# Altium PCB MCU_PCB.PcbDoc (part 1 of 2)
Units mm, origin at the board's own origin, x right, y up, seen from the top; angles counter-clockwise.
Board outline 44.96 x 8.25 mm, 4 copper layers (Top Layer, Layer 1, Layer 2, Bottom Layer), stack 0.797 mm thick; 87 components, 49 nets, 262 pads, 147 vias.
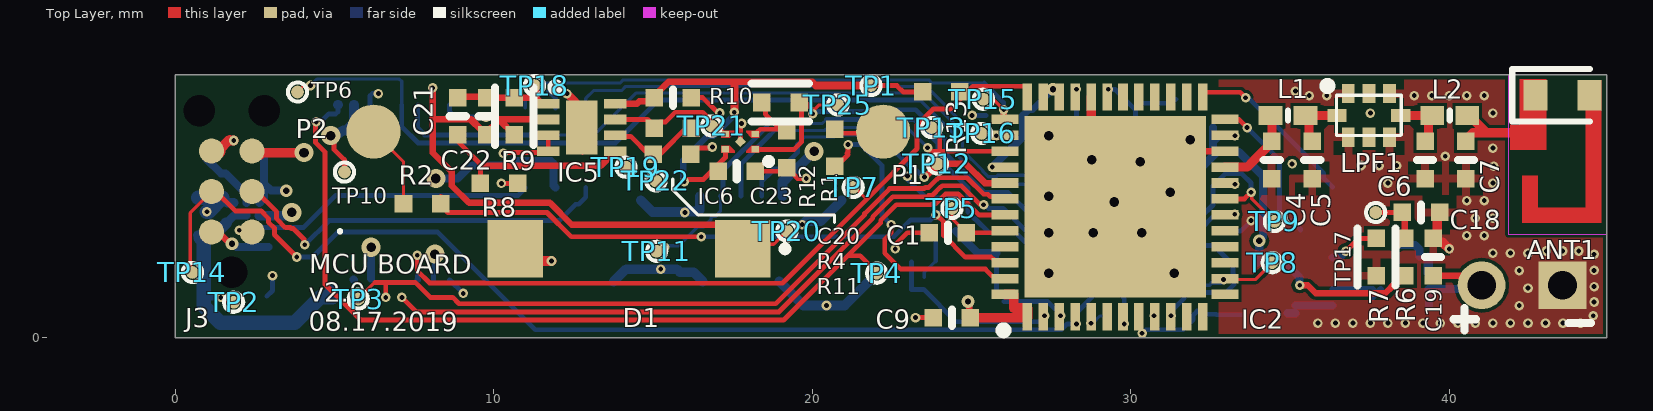
[diagram p0: Top Layer view]
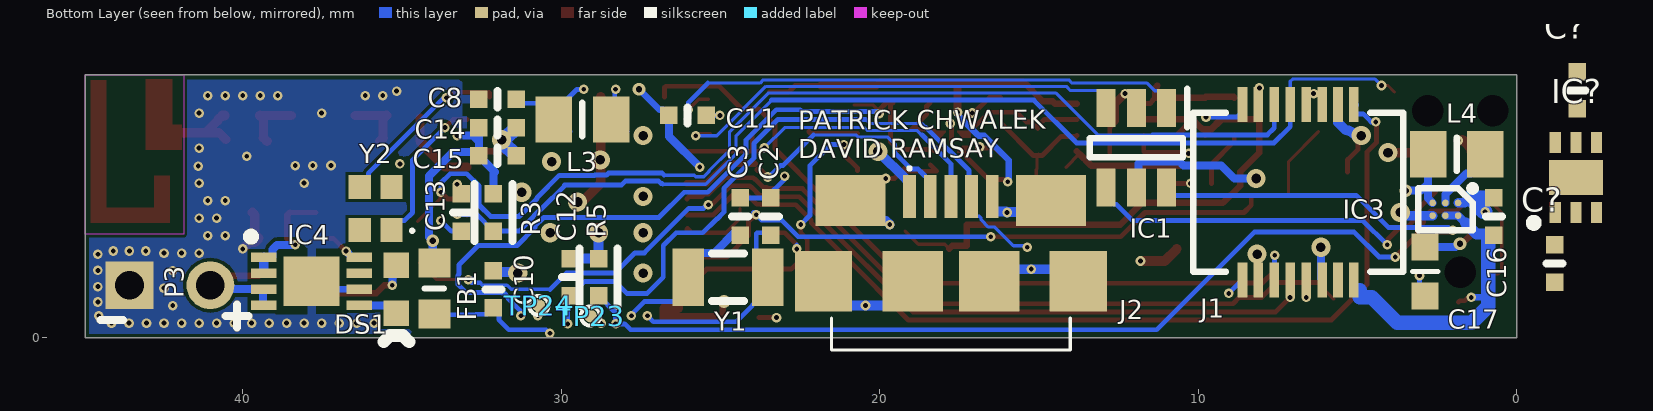
[diagram p1: Bottom Layer view, seen from below]
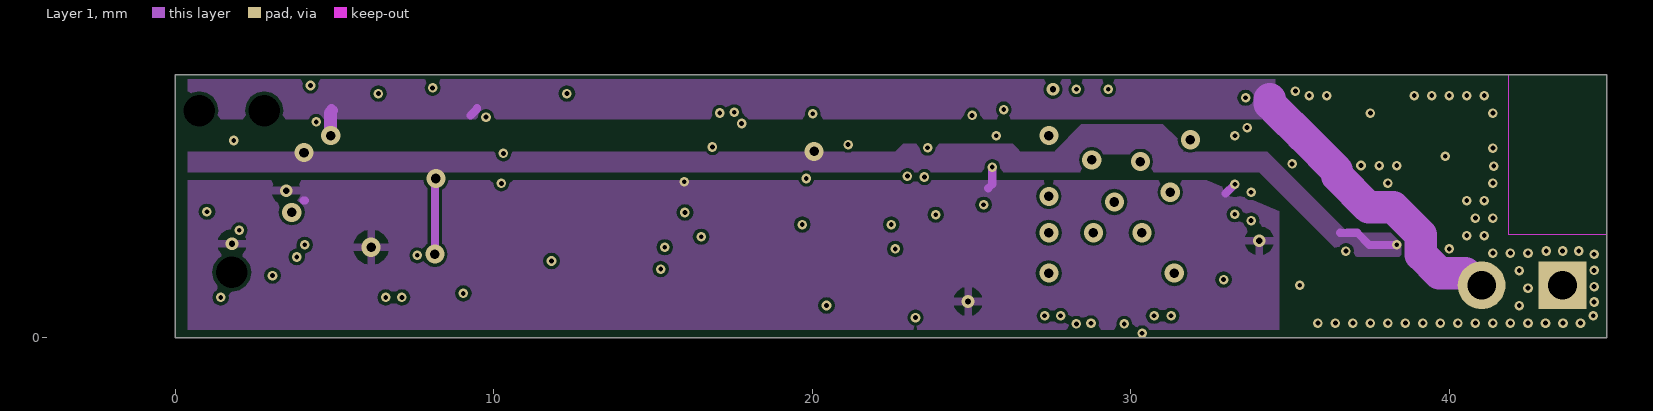
[diagram p2: Layer 1]
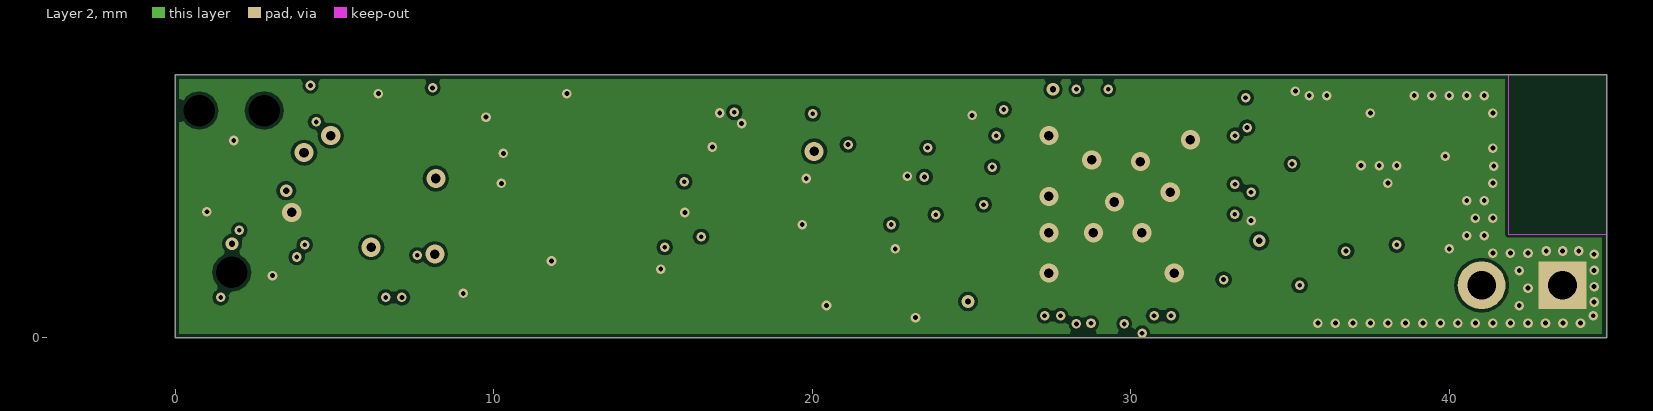
[diagram p3: Layer 2]
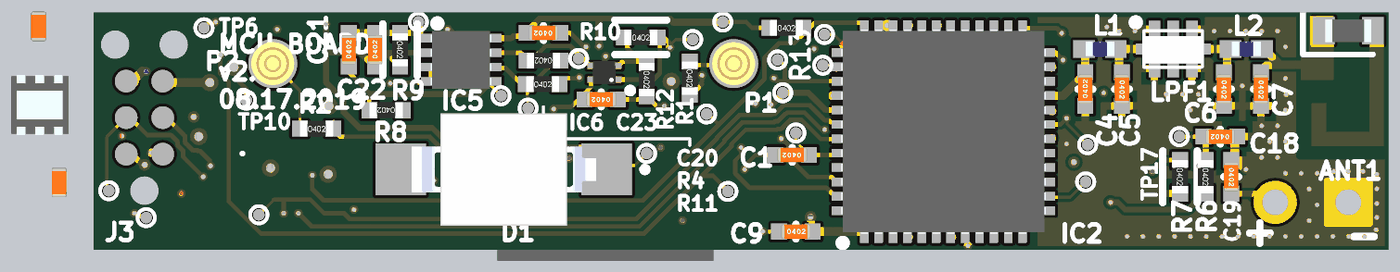
[diagram p4: 3D render of the assembled board from above, using the file's embedded part models]
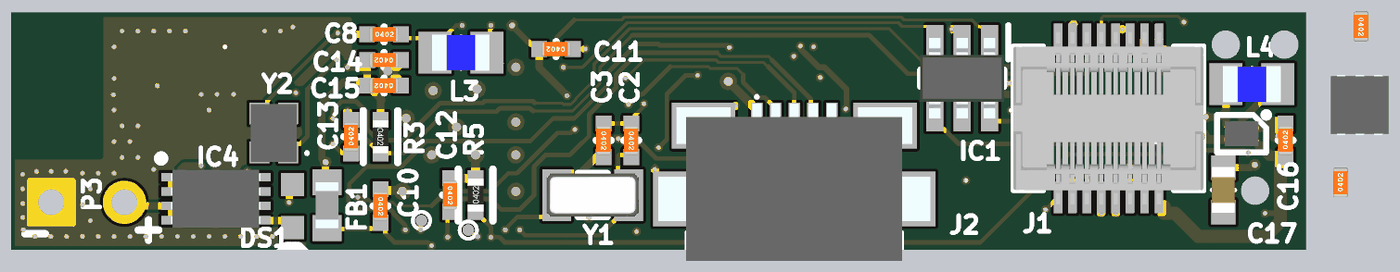
[diagram p5: 3D render of the assembled board from below, using the file's embedded part models]

## Layer stack, top to bottom
Top Solder: solder mask 0.0102, Solder Resist, Dk 3.5
Top Layer: signal copper 0.0356
Dielectric 2: prepreg 0.168, PP-006, Dk 4.1
Layer 1: signal copper 0.035
Dielectric 1: dielectric 0.32, FR-4, Dk 4.8
Layer 2: signal copper 0.035
Dielectric 3: prepreg 0.168, PP-006, Dk 4.1
Bottom Layer: signal copper 0.0356
Bottom Solder: solder mask 0.0102, Solder Resist, Dk 3.5

## Board outline
0,0 44.958,0 44.958,8.255 0,8.255

## Design rules (kind name [scope] priority, off if disabled: settings)
AssemblyTestpoint [(IsPad And (OnTopLayer Or OnBottomLayer)) Or (IsVia) Or (IsPad And OnMultiLayer)] p1: testpointundercomponent=TRUE minsize=0.5 maxsize=2.54 preferedsize=1 minholesize=0 maxholesize=1.016 preferedholesize=0.813 testpointgrid=0.025 usegrid=FALSE gridtolerance=0 allowsidetop=TRUE
Clearance [All] p1: gap=0.102 ignorepadtopadclearanceinfootprint=FALSE except(0: Arc-Hole Track-Hole SMDPad-Hole THPad-Hole Via-Hole Fill-Hole Poly-Hole Region-Hole Text-Hole)
PolygonConnect NO_THERMAL [InNet('GND')    or InNet('5V')] p1: thpad.connectstyle=Direct thpad.reliefconductorwidth=0.254 thpad.reliefentries=4 thpad.polygonreliefangle="90 Angle" thpad.airgapwidth=0.254 smdpad.connectstyle=Relief smdpad.reliefconductorwidth=0.254 smdpad.reliefentries=4 smdpad.polygonreliefangle="90 Angle" smdpad.airgapwidth=0.254 via.connectstyle=Direct via.reliefconductorwidth=0.254 via.reliefentries=4 via.polygonreliefangle="90 Angle" via.airgapwidth=0.254
PolygonConnect [All] p2: connectstyle=Relief reliefconductorwidth=0.254 reliefentries=4 polygonreliefangle="90 Angle" airgapwidth=0.254
RoutingVias PWR_Vias [InNet('3.3V') or InNet('5V') or InNet('VBAT') or InNet('VBAT_RAW') or InNet('3.3V_MCU')       or InNet('VBAT_1')] p1: holewidth=0.3 width=0.6 viastyle="Through Hole" minholewidth=0.15 minwidth=0.3 maxholewidth=0.711 maxwidth=1.27
RoutingVias [All] p2: holewidth=0.15 width=0.3 viastyle="Through Hole" minholewidth=0.15 minwidth=0.3 maxholewidth=0.354 maxwidth=0.762
SolderMaskExpansion [All] p1: expansion=0.102
Width RF [InNet('RF_OUT') or InNet('NetC5_2') or InNet('NetC6_2') or InNet('NetANT1_1')] p1: maxlimit=0.457 minlimit=0.152 preferedwidth=0.305 midlayer1_minwidth=0.254 midlayer1_maxwidth=0.254 midlayer1_prefwidth=0.254 midlayer2_minwidth=0.254 midlayer2_maxwidth=0.254 midlayer2_prefwidth=0.254 minimp=50.000000 maximp=50.000000 favimp=50.000000
Width PWR [InNet('3.3V') or InNet('5V') or InNet('VBAT') or InNet('VBAT_1') or InNet('GND')   or InNet('VBAT_MUX')] p2: maxlimit=1.016 minlimit=0.152 preferedwidth=0.457 toplayer_maxwidth=0.457 toplayer_prefwidth=0.305 midlayer1_minwidth=0.254 midlayer2_minwidth=0.254 midlayer2_maxwidth=0.254 midlayer2_prefwidth=0.254 bottomlayer_maxwidth=0.457 bottomlayer_prefwidth=0.305 minimp=50.000000 maximp=50.000000 favimp=50.000000
Width [All] p3: maxlimit=0.254 minlimit=0.102 preferedwidth=0.254 toplayer_maxwidth=0.203 toplayer_prefwidth=0.152 midlayer1_minwidth=0.254 midlayer2_minwidth=0.254 bottomlayer_prefwidth=0.152 minimp=50.000000 maximp=50.000000 favimp=50.000000
29 further rules are at their usual default settings.

## Classes and differential pairs
component class Sch_sensors: C20 C21 C22 C23 D1 IC5 IC6 R4 R8 R9 R10 R11 R12 TP18 TP19 TP20 TP21 TP22 TP25
component class Sch_pwr: C16 C17 C18 C19 C? DS1 IC3 IC4 IC? L4 P3 R6 R7
component class Sch_mcu: ANT1 C2 C3 C4 C5 C6 C7 C8 C9 C10 C11 C12 C13 C14 C15 FB1 IC2 L1 L2 L3 LPF1 R3 R5 R13 TP23 TP24 Y1 Y2
component class Sch_external_connectors: C1 IC1 J1 J2 J3 P1 P2 R1 R2 TP1 TP2 TP3 TP4 TP5 TP6 TP7 TP8 TP9 TP10 TP11 TP12 TP13 TP14 TP15 TP16 TP17

## Components (designator, comment, footprint, x,y, rotation, side; value= is the part's Value field where it differs from the comment)
ANT1 "2450AT14A0100T" ANTC1608X40N 43.561,7.62 r0 top
C1 "10000pF" SMD-0402C 24.257,3.302 r90 top
C2 "15pF" SMD-0402C 23.425,3.81 r0 bottom
C3 "15pF" SMD-0402C 24.384,3.81 r0 bottom
C4 "0.80pF" SMD-0402C 34.433,5.588 r0 top
C5 "0.30pF" SMD-0402C 35.703,5.588 r180 top
C6 "0.80pF" SMD-0402C 39.243,5.588 r180 top
C7 "0.30pF" SMD-0402C 40.529,5.588 r180 top
C8 "4.7µF" SMD-0402C 32.004,7.493 r270 bottom
C9 "0.10µF" SMD-0402C 24.384,0.635 r270 top
C10 "0.10µF" SMD-0402C 32.131,1.524 r0 bottom
C11 "0.10µF" SMD-0402C 26.035,6.985 r90 bottom
C12 "0.10µF" SMD-0402C 29.718,1.905 r0 bottom
C13 "0.10µF" SMD-0402C 33.147,3.937 r180 bottom
C14 "0.10µF" SMD-0402C 32.004,6.604 r90 bottom
C15 "100pF" SMD-0402C 32.004,5.715 r90 bottom
C16 "2.2µF" SMD-0402C 0.711,3.81 r180 bottom
C17 "10µF" SMD-0603C 2.87,2.083 r0 bottom
C18 "4.7µF" SMD-0402C 39.116,3.937 r90 top
C19 "4.7µF" SMD-0402C 39.497,2.54 r180 top
C20 "0.10µF" SMD-0402C 15.621,7.544 r90 top
C21 "10000pF" SMD-0402C 8.865,6.96 r0 top
C22 "5pF" SMD-0402C 9.779,6.96 r0 top
C23 "0.10µF" SMD-0402C 17.628,5.232 r90 top
C? "1µF" SMD-0402C -1.194,2.337 r180 bottom
C? "1µF" SMD-0402C -1.905,7.772 r0 bottom
D1 "VBPW34FASR" VBPW34FASR 14.243,2.794 r180 top
DS1 "LTST-C190KFKT" LTST-C190KFKT_V 35.179,1.524 r270 bottom
FB1 "BLM18KG601SZ1D" BEADC1608X95N 33.985,1.549 r90 bottom
IC1 "USBLC6-2SC6" SOT95P280X145-6N 11.938,5.969 r270 bottom
IC2 "STM32WB55CGU6" QFN50P700X700X65-49N-D 29.508,4.112 r90 top
IC3 "FAN53600AUC33X" BGA6C40P2X3_86X116X62 2.235,4.039 r270 bottom
IC4 "MCP73831T-2ACI_MC" SON50P300X200X100-9N-D 37.846,1.778 r180 bottom
IC5 "TLV9062IDSGT" SON50P200X200X80-9N 12.759,6.608 r0 top
IC6 "TLV9061DPWR" X2SON 17.742,6.161 r180 top
IC? "MCP1700T-3302E_MAY" SON65P200X200X90-7N -1.865,5.037 r90 bottom
J1 "54722-0164" 54722-0164 6.858,4.572 r180 bottom
J2 "ZX62-B-5PA(33)" ZX62B5PA33 17.765,2.495 r180 bottom
J3 "TC2030-CTX-NL" TC2030MCPNL10 1.97,4.597 r90 top
L1 "LQG15HS2N7S02D" INDC1005X55N 34.941,6.985 r0 top
L2 "LQG15HS2N7S02D" INDC1005X55N 40.021,6.985 r0 top
L3 "LBR2012T100K" INDC2012X145N 29.337,6.858 r0 bottom
L4 "LQM21PN1R0MC0D" INDC2012X55N 1.88,5.766 r0 bottom
LPF1 "LFL212G45TC1A007" LFL212G45TC1A007 37.481,6.985 r0 top
P1 "P70-5000045R" P70-5000045R 22.225,6.477 r0 top
P2 "P70-5000045R" P70-5000045R 6.223,6.477 r0 top
P3 "Header 2" HDR1X2 43.561,1.651 r180 bottom
R1 "1k" SMD-0402-RES 20.701,5.969 r180 top
R2 "1k" SMD-0402-RES 7.747,4.216 r270 top
R3 "10k" SMD-0402-RES 32.131,3.937 r0 bottom
R4 "20k" SMD-0402-RES 15.621,6.579 r90 top
R5 "100k" SMD-0402-RES 28.829,1.905 r180 bottom
R6 "80.6k" SMD-0402-RES 38.608,2.54 r180 top
R7 "10k" SMD-0402-RES 37.719,2.54 r180 top
R8 "47k" SMD-0402-RES 10.16,4.851 r90 top
R9 "100k" SMD-0402-RES 10.643,6.96 r180 top
R10 "20k" SMD-0402-RES 18.999,7.391 r270 top
R11 "3.3k" SMD-0402-RES 15.596,5.766 r270 top
R12 "3.3k" SMD-0402-RES 19.205,5.921 r180 top
R13 "10k" SMD-0402-RES 24.054,7.722 r270 top
TP1 "TestPoint" TESTPOINT_0.4MM 21.846,7.923 r90 top
TP2 "TestPoint" TESTPOINT_0.4MM 1.829,1.118 r90 top
TP3 "TestPoint" TESTPOINT_0.4MM 5.74,1.219 r90 top
TP4 "TestPoint" TESTPOINT_0.4MM 22.022,2.032 r90 top
TP5 "TestPoint" TESTPOINT_0.4MM 24.384,4.064 r90 top
TP6 "TestPoint" TESTPOINT_0.4MM 3.835,7.722 r90 top
TP7 "TestPoint" TESTPOINT_0.4MM 21.285,4.724 r90 top
TP8 "TestPoint" TESTPOINT_0.4MM 34.442,2.362 r90 top
TP9 "TestPoint" TESTPOINT_0.4MM 34.512,3.658 r90 top
TP10 "TestPoint" TESTPOINT_0.4MM 5.309,5.207 r90 top
TP11 "TestPoint" TESTPOINT_0.4MM 15.113,2.718 r90 top
TP12 "TestPoint" TESTPOINT_0.4MM 23.927,5.462 r90 top
TP13 "TestPoint" TESTPOINT_0.4MM 23.749,6.604 r90 top
TP14 "TestPoint" TESTPOINT_0.4MM 0.531,2.055 r90 top
TP15 "TestPoint" TESTPOINT_0.4MM 25.375,7.493 r180 top
TP16 "TestPoint" TESTPOINT_0.4MM 25.317,6.42 r90 top
TP17 "TestPoint" TESTPOINT_0.4MM 37.694,3.937 r90 top
TP18 "TestPoint" TESTPOINT_0.4MM 11.278,7.925 r90 top
TP19 "TestPoint" TESTPOINT_0.4MM 14.148,5.359 r90 top
TP20 "TestPoint" TESTPOINT_0.4MM 19.202,3.353 r90 top
TP21 "TestPoint" TESTPOINT_0.4MM 16.84,6.655 r90 top
TP22 "TestPoint" TESTPOINT_0.4MM 15.088,4.928 r90 top
TP23 "TestPoint" TESTPOINT_0.4MM 29.083,0.686 r90 bottom
TP24 "TestPoint" TESTPOINT_0.4MM 30.709,1.016 r90 bottom
TP25 "TestPoint" TESTPOINT_0.4MM 20.803,7.315 r90 top
Y1 "NX3215SA-32.768K-STD-MUA-8" NX3215SA 24.765,1.905 r0 bottom
Y2 "XRCGB32M000F1H01R0" XRCGB32M000F1H01R0 35.833,4.064 r90 bottom

## Footprints (in the part's own frame and the unit in brackets; to place one, negate y for a bottom-side part, rotate by r counter-clockwise, add the part's x,y. Pads: shape width x height; smd on the part's side, far side on the other; paste and mask are expansions set on the pad)
54722-0164 [mm]
  rect 0.3x1.1 smd: 1(-1.75,-2.75) 2(-1.75,2.75) 3(-1.25,-2.75) 4(-1.25,2.75) 5(-0.75,-2.75) 6(-0.75,2.75) 7(-0.25,-2.75) 8(-0.25,2.75) 9(0.25,-2.75) 10(0.25,2.75) 11(0.75,-2.75) 12(0.75,2.75) 13(1.25,-2.75) 14(1.25,2.75) 15(1.75,-2.75) 16(1.75,2.75)
  silkscreen extent -3.3,-2.5 3.3,2.5, body extent -3.3,-3 3.3,3, height 1.18
ANTC1608X40N [mm]
  rect 0.75x0.95 smd: 1(-0.85,0) 2(0.85,0)
  silkscreen extent -1.58,-0.82 0.85,0.82, body extent -0.8,-0.4 0.8,0.4, height 0.4
BEADC1608X95N [mm]
  rect 0.9x1 smd: 1(-0.8,0) 2(0.8,0)
  silkscreen extent 0,-0.3 0,0.3, body extent -0.8,-0.4 0.8,0.4, height 0.95
BGA6C40P2X3_86X116X62 [mm]
  round 0.208 smd: A1(-0.2,0.4) A2(0.2,0.4) B1(-0.2,0) B2(0.2,0) C1(-0.2,-0.4) C2(0.2,-0.4)
  silkscreen extent -0.75,-0.85 0.65,0.95, body extent -0.43,-0.58 0.43,0.58, height 0.63
HDR1X2 [mm] "Connector; Header; 2 Position"
  rect 1.5x1.5 hole 0.9: 1(0,0)
  round 1.5 hole 0.9: 2(2.54,0)
INDC1005X55N [mm]
  rect 0.75x0.6 smd: 1(-0.55,0) 2(0.55,0)
  silkscreen extent 0,-0.15 0,0.15, body extent -0.5,-0.25 0.5,0.25, height 0.55
INDC2012X55N [mm]
  rect 1.15x1.45 smd: 1(-0.9,0) 2(0.9,0)
  silkscreen extent 0,-0.53 0,0.53, body extent -1,-0.63 1,0.63, height 0.55
INDC2012X145N [mm]
  rect 1.15x1.45 smd: 1(-0.9,0) 2(0.9,0)
  silkscreen extent 0,-0.53 0,0.53, body extent -1,-0.63 1,0.63, height 1.45
LFL212G45TC1A007 [mm]
  rect 0.4x0.6 smd: 1(-0.65,0.685) 2(0,0.685) 3(0.65,0.685) 5(0.65,-0.685) 6(0,-0.685) 7(-0.65,-0.685)
  rect 0.6x0.4 smd: 4(1,0) 8(-1,0)
  silkscreen extent -1.42,-0.64 1.02,1.05, body extent -1,-0.5 1,0.45, height 0.87
LTST-C190KFKT_V [mm] "SMD, 2-Leads, Body 1.6x0.8mm"
  rect 0.8x0.8 smd: 1(-0.75,0) 2(0.75,0)
  silkscreen extent 1.45,-0.4 1.65,0.4, body extent -0.8,-0.4 0.8,0.4, height 0.9
NX3215SA [mm]
  rect 1x1.8 smd: 1(-1.25,0) 2(1.25,0)
  silkscreen extent -0.5,-0.75 0.5,0.75, body extent -1.6,-0.75 1.6,0.75, height 0.8
P70-5000045R [mm]
  round 1.7 smd: 1(0,0)
  body extent -0.75,-0.75 0.75,0.75, height 2.4
QFN50P700X700X65-49N-D [mm]
  rect 0.85x0.3 smd: 1(-3.45,2.75) 2(-3.45,2.25) 3(-3.45,1.75) 4(-3.45,1.25) 5(-3.45,0.75) 6(-3.45,0.25) 7(-3.45,-0.25) 8(-3.45,-0.75) 9(-3.45,-1.25) 10(-3.45,-1.75) 11(-3.45,-2.25) 12(-3.45,-2.75) 25(3.45,-2.75) 26(3.45,-2.25) 27(3.45,-1.75) 28(3.45,-1.25) 29(3.45,-0.75) 30(3.45,-0.25) 31(3.45,0.25) 32(3.45,0.75) 33(3.45,1.25) 34(3.45,1.75) 35(3.45,2.25) 36(3.45,2.75)
  rect 0.3x0.85 smd: 13(-2.75,-3.45) 14(-2.25,-3.45) 15(-1.75,-3.45) 16(-1.25,-3.45) 17(-0.75,-3.45) 18(-0.25,-3.45) 19(0.25,-3.45) 20(0.75,-3.45) 21(1.25,-3.45) 22(1.75,-3.45) 23(2.25,-3.45) 24(2.75,-3.45) 37(2.75,3.45) 38(2.25,3.45) 39(1.75,3.45) 40(1.25,3.45) 41(0.75,3.45) 42(0.25,3.45) 43(-0.25,3.45) 44(-0.75,3.45) 45(-1.25,3.45) 46(-1.75,3.45) 47(-2.25,3.45) 48(-2.75,3.45)
  rect 5.7x5.7 smd: 49(0,0)
  silkscreen extent -4,3.37 -3.75,3.62, body extent -3.55,-3.55 3.55,3.55, height 0.65
SMD-0402-RES [mm]
  rect 0.55x0.55 smd: 1(0,0.584) 2(0,-0.584)
  body extent -0.27,-0.57 0.28,0.58, height 0.41
SMD-0402C [mm]
  rect 0.55x0.55 smd: 1(0,0.584) 2(0,-0.584)
  silkscreen extent -0.25,0 0.25,0, body extent -0.25,-0.51 0.25,0.51, height 0.51
SMD-0603C [mm]
  rect 0.85x0.85 smd: 1(0,0.775) 2(0,-0.775)
  silkscreen extent -0.4,0 0.4,0, body extent -0.4,-0.8 0.4,0.8, height 0.9
SON50P200X200X80-9N [mm]
  rect 0.7x0.3 smd: 1(-1.05,0.75) 2(-1.05,0.25) 3(-1.05,-0.25) 4(-1.05,-0.75) 5(1.05,-0.75) 6(1.05,-0.25) 7(1.05,0.25) 8(1.05,0.75)
  rect 1x1.7 smd: 9(0,0)
  silkscreen extent -0.95,1.14 -0.7,1.39, body extent -1.05,-1 1.05,1, height 0.8
SON50P300X200X100-9N-D [mm]
  rect 0.8x0.3 smd: 1(-1.5,0.75) 2(-1.5,0.25) 3(-1.5,-0.25) 4(-1.5,-0.75) 5(1.5,-0.75) 6(1.5,-0.25) 7(1.5,0.25) 8(1.5,0.75)
  rect 1.75x1.55 smd: 9(0,0)
  silkscreen extent -2.02,1.28 -1.78,1.52, body extent -1.55,-1 1.55,1, height 1
SON65P200X200X90-7N [mm]
  rect 0.65x0.35 smd: 1(-1.1,0.65) 2(-1.1,0) 3(-1.1,-0.65) 4(1.1,-0.65) 5(1.1,0) 6(1.1,0.65)
  rect 1.1x1.7 smd: 7(0,0)
  silkscreen extent -1.55,1.2 -1.3,1.45, body extent -1.05,-1 1.05,1, height 0.9
SOT95P280X145-6N [mm]
  rect 1.2x0.6 smd: 1(-1.25,0.95) 2(-1.25,0) 3(-1.25,-0.95) 4(1.25,-0.95) 5(1.25,0) 6(1.25,0.95)
  silkscreen extent -1.85,-1.46 0.3,1.6, body extent -1.4,-1.46 1.4,1.46, height 1.45
TC2030MCPNL10 [mm]
  round 0.787 smd: 1(-1.27,-0.434) 2(-1.27,0.836) 3(0,-0.434) 4(0,0.836) 5(1.27,-0.434) 6(1.27,0.836)
  round 0.495 hole 0.991 unplated: 7(-2.54,0.201) 8(2.54,1.217) 9(2.54,-0.815)
  silkscreen extent -1.3,-3.25 -1.2,-3.15
TESTPOINT_0.4MM [mm]
  round 0.4 smd: 1(0,0)
  silkscreen extent -0.3,-0.3 0.3,0.3
VBPW34FASR [mm]
  rect 1.75x1.8 smd: 1(-3.575,0) 2(3.575,0)
  silkscreen extent -5,-0.1 -4.8,0.1, body extent -3.2,-1.95 3.2,1.95, height 1.51
X2SON [mm]
  rect 0.24x0.2 smd mask+0: 1(-0.47,0.24) 2(-0.47,-0.24) 4(0.47,-0.24) 5(0.47,0.24)
  rect 0.25x0.25 smd rot 45: 3(0,0)
  Top Layer region: -0.6,0.13 -0.6,0.35 -0.18,0.35 -0.18,0.29 -0.34,0.13
  Top Layer region: 0.6,-0.13 0.6,-0.35 0.18,-0.35 0.18,-0.29 0.34,-0.13
  Top Layer region: 0.6,0.13 0.6,0.35 0.18,0.35 0.18,0.29 0.34,0.13
  Top Layer region: -0.6,-0.13 -0.6,-0.35 -0.18,-0.35 -0.18,-0.29 -0.34,-0.13
  silkscreen extent -0.97,0.54 -0.81,0.7, body extent -0.39,-0.4 0.41,0.4, height 0.4
XRCGB32M000F1H01R0 [mm]
  rect 0.75x0.7 smd: 1(-0.675,-0.5) 2(0.675,-0.5) 3(0.675,0.5) 4(-0.675,0.5)
  silkscreen extent -0.75,-1.2 -0.65,-1.1, body extent -1,-0.8 1,0.8, height 0.8
ZX62B5PA33 [mm]
  rect 0.4x1.35 smd: 1(-1.3,1.95) 2(-0.65,1.95) 3(0,1.95) 4(0.65,1.95) 5(1.3,1.95)
  rect 2.2x1.6 smd: 6(-3.15,1.825) 7(3.15,1.825)
  rect 1.8x1.9 smd: 8(-4,-0.725) 11(4,-0.725)
  rect 1.9x1.9 smd: 9(-1.2,-0.725) 10(1.2,-0.725)
  silkscreen extent -3.75,-2.88 3.75,2.87, body extent -4.72,-2.88 4.72,2.59, height 2.9

## Part data
ANT1: "Antenna", Manufacturer_Name="JOHANSON TECHNOLOGY", Mouser Part Number=609-2450AT14A0100T, Datasheet Link=https://www.johansontechnology.com/datasheets/2450AT14A0100/2450AT14A0100.pdf, Height=0.4mm, Manufacturer_Part_Number=2450AT14A0100T, Mouser Price/Stock=https://www.mouser.com/Search/Refine.aspx?Keyword=609-2450AT14A0100T
C1 C21: library part GCM155R71H103KA55D, "CAP CER 10000PF 50V X7R 0402", Digi-Key Part Number=490-4762-1-ND, Manufacturer="Murata Electronics North America", Operating Temperature="-55°C ~ 125°C", Package / Case="0402 (1005 Metric)", Ratings=AEC-Q200, Temperature Coefficient=X7R, Tolerance=±10%, Voltage=50V, @ qty=0, Applications=Automotive, Datasheets=http://www.murata.com/~/media/webrenewal/support/library/catalog/products/capacitor/mlcc/c03e.ashx, Factory Stock=0, Features=-, Height - Seated (Max)=-, Image=//media.digikey.com/Renders/Murata%20Renders/ZRB-SERIES-0402.jpg, Lead Spacing=-, Lead Style=-, Minimum Quantity=1, Mounting Type="Surface Mount, MLCC", Packaging="Cut Tape (CT)", Part Number=GCM155R71H103KA55D, Part Status=Active, Quantity Available=650067, Series=GCM, Size / Dimension="0.039\" L x 0.020\" W (1.00mm x 0.50mm)", Thickness (Max)="0.022\" (0.55mm)", Unit Price (USD)=0.1
C2 C3: library part GCM1555C1H150JA16D, "CAP CER 15PF 50V NP0 0402", Digi-Key Part Number=490-11147-1-ND, Manufacturer="Murata Electronics North America", Operating Temperature="-55°C ~ 125°C", Package / Case="0402 (1005 Metric)", Ratings=AEC-Q200, Temperature Coefficient="C0G, NP0", Tolerance=±5%, Voltage=50V, @ qty=0, Applications=Automotive, Datasheets=http://www.murata.com/~/media/webrenewal/support/library/catalog/products/capacitor/mlcc/c03e.ashx, Factory Stock=0, Features=-, Height - Seated (Max)=-, Image=//media.digikey.com/Renders/Murata%20Renders/ZRB-SERIES-0402.jpg, Lead Spacing=-, Lead Style=-, Minimum Quantity=1, Mounting Type="Surface Mount, MLCC", Packaging="Cut Tape (CT)", Part Number=GCM1555C1H150JA16D, Part Status=Active, Quantity Available=6185, Series=GCM, Size / Dimension="0.039\" L x 0.020\" W (1.00mm x 0.50mm)", Thickness (Max)="0.022\" (0.55mm)", Unit Price (USD)=0.1
C4 C6: library part GRM1555C1HR80BA01D, "CAP CER 0.8PF 50V NP0 0402", Digi-Key Part Number=490-6269-1-ND, Manufacturer="Murata Electronics North America", Operating Temperature="-55°C ~ 125°C", Package / Case="0402 (1005 Metric)", Ratings=-, Temperature Coefficient="C0G, NP0", Tolerance=±0.1pF, Voltage=50V, @ qty=0, Applications="General Purpose", Datasheets=http://www.murata.com/~/media/webrenewal/support/library/catalog/products/capacitor/mlcc/c02e.pdf, Factory Stock=0, Features=-, Height - Seated (Max)=-, Image=//media.digikey.com/Renders/Murata%20Renders/ZRB-SERIES-0402.jpg, Lead Spacing=-, Lead Style=-, Minimum Quantity=1, Mounting Type="Surface Mount, MLCC", Packaging="Cut Tape (CT)", Part Number=GRM1555C1HR80BA01D, Part Status=Active, Quantity Available=38847, Series=GRM, Size / Dimension="0.039\" L x 0.020\" W (1.00mm x 0.50mm)", Thickness (Max)="0.022\" (0.55mm)", Unit Price (USD)=0.1
C5 C7: library part GRM1555C1HR30WA01D, "CAP CER 0.3PF 50V NP0 0402", Digi-Key Part Number=490-6261-1-ND, Manufacturer="Murata Electronics North America", Operating Temperature="-55°C ~ 125°C", Package / Case="0402 (1005 Metric)", Ratings=-, Temperature Coefficient="C0G, NP0", Tolerance=±0.05pF, Voltage=50V, @ qty=0, Applications="General Purpose", Datasheets=http://www.murata.com/~/media/webrenewal/support/library/catalog/products/capacitor/mlcc/c02e.pdf, Factory Stock=0, Features=-, Height - Seated (Max)=-, Image=//media.digikey.com/Renders/Murata%20Renders/ZRB-SERIES-0402.jpg, Lead Spacing=-, Lead Style=-, Minimum Quantity=1, Mounting Type="Surface Mount, MLCC", Packaging="Cut Tape (CT)", Part Number=GRM1555C1HR30WA01D, Part Status=Active, Quantity Available=61475, Series=GRM, Size / Dimension="0.039\" L x 0.020\" W (1.00mm x 0.50mm)", Thickness (Max)="0.022\" (0.55mm)", Unit Price (USD)=0.16
C8 C18 C19: library part GRM153R60G475ME15D, "CAP CER 4.7UF 4V X5R 0402", Digi-Key Part Number=490-13231-1-ND, Manufacturer="Murata Electronics North America", Operating Temperature="-55°C ~ 85°C", Package / Case="0402 (1005 Metric)", Ratings=-, Temperature Coefficient=X5R, Tolerance=±20%, Voltage=4V, @ qty=0, Applications="General Purpose", Datasheets=http://psearch.en.murata.com/capacitor/product/GRM153R60G475ME15%23.pdf, Factory Stock=0, Features=-, Height - Seated (Max)=-, Image=//media.digikey.com/Renders/Murata%20Renders/ZRB-SERIES-0402.jpg, Lead Spacing=-, Lead Style=-, Minimum Quantity=1, Mounting Type="Surface Mount, MLCC", Packaging="Cut Tape (CT)", Part Number=GRM153R60G475ME15D, Part Status=Active, Quantity Available=9100, Series=GRM, Size / Dimension="0.039\" L x 0.020\" W (1.00mm x 0.50mm)", Thickness (Max)="0.013\" (0.33mm)", Unit Price (USD)=0.27
C9 C10 C11 C12 C13 C14 C20 C23: library part GCM155R71C104KA55D, "CAP CER 0.1UF 16V X7R 0402", Digi-Key Part Number=490-4759-1-ND, Manufacturer="Murata Electronics North America", Operating Temperature="-55°C ~ 125°C", Package / Case="0402 (1005 Metric)", Ratings=AEC-Q200, Temperature Coefficient=X7R, Tolerance=±10%, Voltage=16V, @ qty=0, Applications=Automotive, Datasheets=http://www.murata.com/~/media/webrenewal/support/library/catalog/products/capacitor/mlcc/c03e.ashx, Factory Stock=0, Features=-, Height - Seated (Max)=-, Image=//media.digikey.com/Renders/Murata%20Renders/ZRB-SERIES-0402.jpg, Lead Spacing=-, Lead Style=-, Minimum Quantity=1, Mounting Type="Surface Mount, MLCC", Packaging="Cut Tape (CT)", Part Number=GCM155R71C104KA55D, Part Status=Active, Quantity Available=734194, Series=GCM, Size / Dimension="0.039\" L x 0.020\" W (1.00mm x 0.50mm)", Thickness (Max)="0.022\" (0.55mm)", Unit Price (USD)=0.1
C15: library part GCM1555C1H101JA16D, "CAP CER 100PF 50V NP0 0402", Digi-Key Part Number=490-10669-1-ND, Manufacturer="Murata Electronics North America", Operating Temperature="-55°C ~ 125°C", Package / Case="0402 (1005 Metric)", Ratings=AEC-Q200, Temperature Coefficient="C0G, NP0", Tolerance=±5%, Voltage=50V, @ qty=0, Applications=Automotive, Datasheets=http://www.murata.com/~/media/webrenewal/support/library/catalog/products/capacitor/mlcc/c03e.ashx, Factory Stock=0, Features=-, Height - Seated (Max)=-, Image=//media.digikey.com/Renders/Murata%20Renders/ZRB-SERIES-0402.jpg, Lead Spacing=-, Lead Style=-, Minimum Quantity=1, Mounting Type="Surface Mount, MLCC", Packaging="Cut Tape (CT)", Part Number=GCM1555C1H101JA16D, Part Status=Active, Quantity Available=61397, Series=GCM, Size / Dimension="0.039\" L x 0.020\" W (1.00mm x 0.50mm)", Thickness (Max)="0.022\" (0.55mm)", Unit Price (USD)=0.1
C16: library part GRM155R60J225ME15D, "CAP CER 2.2UF 6.3V X5R 0402", Digi-Key Part Number=490-4519-1-ND, Manufacturer="Murata Electronics North America", Operating Temperature="-55°C ~ 85°C", Package / Case="0402 (1005 Metric)", Ratings=-, Temperature Coefficient=X5R, Tolerance=±20%, Voltage=6.3V, @ qty=0, Applications="General Purpose", Datasheets=http://www.murata.com/~/media/webrenewal/support/library/catalog/products/capacitor/mlcc/c02e.pdf, Factory Stock=0, Features="Derating Recommended", Height - Seated (Max)=-, Image=//media.digikey.com/Renders/Murata%20Renders/ZRB-SERIES-0402.jpg, Lead Spacing=-, Lead Style=-, Minimum Quantity=1, Mounting Type="Surface Mount, MLCC", Packaging="Cut Tape (CT)", Part Number=GRM155R60J225ME15D, Part Status=Active, Quantity Available=911621, Series=GRM, Size / Dimension="0.039\" L x 0.020\" W (1.00mm x 0.50mm)", Thickness (Max)="0.022\" (0.55mm)", Unit Price (USD)=0.15
C17: library part GRM188R60J106ME47D, "CAP CER 10UF 6.3V X5R 0603", Digi-Key Part Number=490-3896-1-ND, Manufacturer="Murata Electronics North America", Operating Temperature="-55°C ~ 85°C", Package / Case="0603 (1608 Metric)", Ratings=-, Temperature Coefficient=X5R, Tolerance=±20%, Voltage=6.3V, @ qty=0, Applications="General Purpose", Datasheets=http://www.murata.com/~/media/webrenewal/support/library/catalog/products/capacitor/mlcc/c02e.pdf, Factory Stock=0, Features=-, Height - Seated (Max)=-, Image=//media.digikey.com/Renders/Murata%20Renders/ZRB-SERIES-0402.jpg, Lead Spacing=-, Lead Style=-, Minimum Quantity=1, Mounting Type="Surface Mount, MLCC", Packaging="Cut Tape (CT)", Part Number=GRM188R60J106ME47D, Part Status=Active, Quantity Available=1578882, Series=GRM, Size / Dimension="0.063\" L x 0.031\" W (1.60mm x 0.80mm)", Thickness (Max)="0.035\" (0.90mm)", Unit Price (USD)=0.15
C22: library part GJM1555C1H5R0BB01D, "CAP CER 5PF 50V NP0 0402", Digi-Key Part Number=490-8103-1-ND, Manufacturer="Murata Electronics North America", Operating Temperature="-55°C ~ 125°C", Package / Case="0402 (1005 Metric)", Ratings=-, Temperature Coefficient="C0G, NP0", Tolerance=±0.1pF, Voltage=50V, @ qty=0, Applications="RF, Microwave, High Frequency", Datasheets=http://www.murata.com/~/media/webrenewal/support/library/catalog/products/capacitor/mlcc/c02e.pdf, Factory Stock=0, Features="High Q, Low Loss", Height - Seated (Max)=-, Image=//media.digikey.com/Renders/Murata%20Renders/ZRB-SERIES-0402.jpg, Lead Spacing=-, Lead Style=-, Minimum Quantity=1, Mounting Type="Surface Mount, MLCC", Packaging="Cut Tape (CT)", Part Number=GJM1555C1H5R0BB01D, Part Status=Active, Quantity Available=17055, Series=GJM, Size / Dimension="0.039\" L x 0.020\" W (1.00mm x 0.50mm)", Thickness (Max)="0.022\" (0.55mm)", Unit Price (USD)=0.2
C? C?: library part GCM155C71A105KE38D, "CAP CER 1UF 10V X7S 0402", Digi-Key Part Number=490-13409-1-ND, Manufacturer="Murata Electronics North America", Operating Temperature="-55°C ~ 125°C", Package / Case="0402 (1005 Metric)", Ratings=AEC-Q200, Temperature Coefficient=X7S, Tolerance=±10%, Voltage=10V, @ qty=0, Applications=Automotive, Datasheets=http://www.murata.com/~/media/webrenewal/support/library/catalog/products/capacitor/mlcc/c03e.ashx, Factory Stock=0, Features=-, Height - Seated (Max)=-, Image=//media.digikey.com/Renders/Murata%20Renders/ZRB-SERIES-0402.jpg, Lead Spacing=-, Lead Style=-, Minimum Quantity=1, Mounting Type="Surface Mount, MLCC", Packaging="Cut Tape (CT)", Part Number=GCM155C71A105KE38D, Part Status=Active, Quantity Available=7240, Series=GCM, Size / Dimension="0.039\" L x 0.020\" W (1.00mm x 0.50mm)", Thickness (Max)="0.022\" (0.55mm)", Unit Price (USD)=0.12
D1: "Diode", Manufacturer_Name=Vishay, Mouser Part Number=782-VBPW34FASR, RS Part Number=7689401, Datasheet Link=https://www.vishay.com/docs/81127/vbpw34fa.pdf, Height=1.3mm, Manufacturer_Part_Number=VBPW34FASR, Mouser Price/Stock=https://www.mouser.com/Search/Refine.aspx?Keyword=782-VBPW34FASR, RS Price/Stock=https://uk.rs-online.com/web/p/products/7689401
DS1: library part CMP-1674-00008-1, "LED Uni-Color Orange, 75 mW, 30 mA, -35 to 85 degC, 2-Pin SMD, RoHS, Tape and Reel", Case\Package=0603, Case Code (Metric)=1608, Max Operating Temperature="155 degC", Min Operating Temperature="-55 degC", Package Quantity=5000, Power Rating="100 mW", Resistance="47 kohm", Tolerance=1%, Voltage Rating="50 V", Case Code (Imperial)=0603, ComponentLink1Description="Manufacturer URL", ComponentLink1URL=http://www.us.liteon.com/, ComponentLink2Description=Datasheet, ComponentLink2URL=http://optoelectronics.liteon.com/upload/download/DS-22-99-0186/S_110_LTST-C190KFKT.pdf, DatasheetVersion="Rev. I, 09/2011", Height="0.45 mm", Length="1.6 mm", Mount="Surface Mount", PackageDescription="2-Pin Surface Mount Device, Body 1.6 x 0.8 mm", PackageReference=C190KFKT, Packaging="Tape and Reel", Pins=2, REACH SVHC="No SVHC", RoHSCompliant=true, Voltage Rating (DC)="50 V", Width="0.8 mm"
FB1: "Ferrite Bead", Manufacturer_Name="Murata Electronics", Mouser Part Number=81-BLM18KG601SZ1D, Datasheet Link=http://www.murata.com/~/media/webrenewal/support/library/catalog/products/emc/emifil/c31e.ashx?la=en-gb, Height=0.95mm, Manufacturer_Part_Number=BLM18KG601SZ1D, Mouser Price/Stock=https://www.mouser.com/Search/Refine.aspx?Keyword=81-BLM18KG601SZ1D
IC1: "Integrated Circuit", Manufacturer_Name=STMicroelectronics, Mouser Part Number=511-USBLC6-2SC6, RS Part Number=9206266, Allied_Number=70389689, Allied Price/Stock=http://www.alliedelec.com/stmicroelectronics-usblc6-2sc6/70389689/, Datasheet Link=http://www.st.com/st-web-ui/static/active/en/resource/technical/document/datasheet/CD00050750.pdf, Height=1.45mm, Manufacturer_Part_Number=USBLC6-2SC6, Mouser Price/Stock=https://www.mouser.com/Search/Refine.aspx?Keyword=511-USBLC6-2SC6, RS Price/Stock=https://uk.rs-online.com/web/p/products/9206266
IC2: "Integrated Circuit", Manufacturer_Name=STMicroelectronics, Mouser Part Number=511-STM32WB55CGU6, Datasheet Link=https://www.st.com/en/microcontrollers/stm32wb55cg.html, Height=0.65mm, Manufacturer_Part_Number=STM32WB55CGU6, Mouser Price/Stock=https://www.mouser.com/Search/Refine.aspx?Keyword=511-STM32WB55CGU6
IC3: "Integrated Circuit", Manufacturer_Name="Fairchild Semiconductor", Mouser Part Number=512-FAN53600AUC33X, Datasheet Link=https://www.onsemi.com/pub/Collateral/FAN53610-D.pdf, Height=0.625mm, Manufacturer_Part_Number=FAN53600AUC33X, Mouser Price/Stock=https://www.mouser.com/Search/Refine.aspx?Keyword=512-FAN53600AUC33X
IC4: "Integrated Circuit", Manufacturer_Name=Microchip, Manufacturer_Part_Number=MCP73831T-2ACI/MC, Mouser Part Number=579-MCP73831T-2ACIMC, Allied_Number=70452042, Allied Price/Stock=https://www.alliedelec.com/microchiptechnologyinc-mcp73831t-2aci-mc/70452042/, Datasheet Link=http://ww1.microchip.com/downloads/en/DeviceDoc/20001984g.pdf, Height=1mm, Mouser Price/Stock=https://www.mouser.com/Search/Refine.aspx?Keyword=579-MCP73831T-2ACIMC
IC5: "Integrated Circuit", Manufacturer_Name="Texas Instruments", Mouser Part Number=595-TLV9062IDSGT, Datasheet Link=http://www.ti.com/lit/gpn/TLV9062, Height=0.8mm, Manufacturer_Part_Number=TLV9062IDSGT, Mouser Price/Stock=https://www.mouser.com/Search/Refine.aspx?Keyword=595-TLV9062IDSGT
IC?: "Integrated Circuit", Manufacturer_Name=Microchip, Manufacturer_Part_Number=MCP1700T-3302E/MAY, Mouser Part Number=579-MCP1700T3302EMAY, Allied_Number=70567878, Allied Price/Stock=https://www.alliedelec.com/microchip-technology-inc-mcp1700t-3302e-may/70567878/, Datasheet Link=http://ww1.microchip.com/downloads/en/DeviceDoc/20001826D.pdf, Height=0.9mm, Mouser Price/Stock=https://www.mouser.com/Search/Refine.aspx?Keyword=579-MCP1700T3302EMAY
J1: "Connector", Manufacturer_Name=Molex, Mouser Part Number=538-54722-0164, RS Part Number=7206511, Datasheet Link=http://www.molex.com/webdocs/datasheets/pdf/en-us//0547220164_PCB_RECEPTACLES.pdf, Manufacturer_Part_Number=54722-0164, Mouser Price/Stock=https://www.mouser.com/Search/Refine.aspx?Keyword=538-54722-0164, RS Price/Stock=https://uk.rs-online.com/web/p/products/7206511
J2: "Connector", Manufacturer_Name=Hirose, Mouser Part Number=798-ZX62-B-5PA33, RS Part Number=1362267, Datasheet Link=http://www.mouser.com/ds/2/185/ZX_catalog-939768.pdf, Height=2.8mm, Manufacturer_Part_Number=ZX62-B-5PA(33), Mouser Price/Stock=https://www.mouser.com/Search/Refine.aspx?Keyword=798-ZX62-B-5PA33, RS Price/Stock=http://uk.rs-online.com/web/p/products/1362267
J3: "Connector", Manufacturer_Name="Tag Connect", Datasheet Link=http://www.tag-connect.com/Materials/TC2030-CTX.pdf, Height=18mm, Manufacturer_Part_Number=TC2030-CTX-NL
L1 L2: "Inductor", Manufacturer_Name="Murata Electronics", Datasheet Link=https://www.arrow.com/en/products/lqg15hs2n7s02d/murata-manufacturing, Height=0.55mm, Manufacturer_Part_Number=LQG15HS2N7S02D
L3: "Inductor", Manufacturer_Name="TAIYO YUDEN", Mouser Part Number=963-LBR2012T100K, Datasheet Link=https://componentsearchengine.com/Datasheets/2/LBR2012T100K.pdf, Height=1.45mm, Manufacturer_Part_Number=LBR2012T100K, Mouser Price/Stock=https://www.mouser.com/Search/Refine.aspx?Keyword=963-LBR2012T100K
L4: "Inductor", Manufacturer_Name="Murata Electronics", Mouser Part Number=81-LQM21PN1R0MC0D, RS Part Number=7926388, Datasheet Link=https://componentsearchengine.com/Datasheets/2/LQM21PN1R0MC0D.pdf, Height=0.55mm, Manufacturer_Part_Number=LQM21PN1R0MC0D, Mouser Price/Stock=https://www.mouser.com/Search/Refine.aspx?Keyword=81-LQM21PN1R0MC0D, RS Price/Stock=https://uk.rs-online.com/web/p/products/7926388
P3: "Header, 2-Pin", LatestRevisionDate=17-Jul-2002, LatestRevisionNote="Re-released for DXP Platform.", Publisher="Altium Limited"
R1 R2: library part ERJ-2GEJ102X, "RES SMD 1K OHM 5% 1/10W 0402", Digi-Key Part Number=P1.0KJCT-ND, Manufacturer="Panasonic Electronic Components", Operating Temperature="-55°C ~ 155°C", Package / Case="0402 (1005 Metric)", Power (Watts)="0.1W, 1/10W", Supplier Device Package=0402, Temperature Coefficient=±200ppm/°C, Tolerance=±5%, @ qty=1500, Composition="Thick Film", Datasheets=http://industrial.panasonic.com/www-cgi/jvcr13pz.cgi?E+PZ+3+AOA0001+ERJ2GEJ102X+7+WW, Factory Stock=0, Failure Rate=-, Features="Automotive AEC-Q200", Height - Seated (Max)="0.016\" (0.40mm)", Image=//media.digikey.com/Photos/Panasonic%20Photos/ERJ-PA2-Series.jpg, Minimum Quantity=1, Number of Terminations=2, Packaging="Cut Tape (CT)", Part Number=ERJ-2GEJ102X, Part Status=Active, Quantity Available=1939857, Series=ERJ, Size / Dimension="0.039\" L x 0.020\" W (1.00mm x 0.50mm)", Unit Price (USD)=0.00350
R3 R7 R13: library part ERJ-2GEJ103X, "RES SMD 10K OHM 5% 1/10W 0402", Digi-Key Part Number=P10KJCT-ND, Manufacturer="Panasonic Electronic Components", Operating Temperature="-55°C ~ 155°C", Package / Case="0402 (1005 Metric)", Power (Watts)="0.1W, 1/10W", Supplier Device Package=0402, Temperature Coefficient=±200ppm/°C, Tolerance=±5%, @ qty=1500, Composition="Thick Film", Datasheets=http://industrial.panasonic.com/www-cgi/jvcr13pz.cgi?E+PZ+3+AOA0001+ERJ2GEJ103X+7+WW, Factory Stock=0, Failure Rate=-, Features="Automotive AEC-Q200", Height - Seated (Max)="0.016\" (0.40mm)", Image=//media.digikey.com/Photos/Panasonic%20Photos/ERJ-PA2-Series.jpg, Minimum Quantity=1, Number of Terminations=2, Packaging="Cut Tape (CT)", Part Number=ERJ-2GEJ103X, Part Status=Active, Quantity Available=2560215, Series=ERJ, Size / Dimension="0.039\" L x 0.020\" W (1.00mm x 0.50mm)", Unit Price (USD)=0.00350
R4 R10: library part ERJ-2GEJ473X, "RES SMD 20K OHM 5% 1/10W 0402", Digi-Key Part Number=P47KJCT-ND, Manufacturer="Panasonic Electronic Components", Operating Temperature="-55°C ~ 155°C", Package / Case="0402 (1005 Metric)", Power (Watts)="0.1W, 1/10W", Supplier Device Package=0402, Temperature Coefficient=±200ppm/°C, Tolerance=±5%, @ qty=1500, Composition="Thick Film", Datasheets=http://industrial.panasonic.com/www-cgi/jvcr13pz.cgi?E+PZ+3+AOA0001+ERJ2GEJ473X+7+WW, Factory Stock=0, Failure Rate=-, Features="Automotive AEC-Q200", Height - Seated (Max)="0.016\" (0.40mm)", Image=//media.digikey.com/Photos/Panasonic%20Photos/ERJ-PA2-Series.jpg, Minimum Quantity=1, Number of Terminations=2, Packaging="Cut Tape (CT)", Part Number=ERJ-2GEJ473X, Part Status=Active, Quantity Available=5182645, Series=ERJ, Size / Dimension="0.039\" L x 0.020\" W (1.00mm x 0.50mm)", Unit Price (USD)=0.00350
R5: library part ERJ-2RKF1003X, "RES SMD 100K OHM 1% 1/10W 0402", Digi-Key Part Number=P100KLCT-ND, Manufacturer="Panasonic Electronic Components", Operating Temperature="-55°C ~ 155°C", Package / Case="0402 (1005 Metric)", Power (Watts)="0.1W, 1/10W", Supplier Device Package=0402, Temperature Coefficient=±100ppm/°C, Tolerance=±1%, @ qty=1500, Composition="Thick Film", Datasheets=http://industrial.panasonic.com/www-cgi/jvcr13pz.cgi?E+PZ+3+AOA0002+ERJ2RKF1003X+7+WW, Factory Stock=0, Failure Rate=-, Features="Automotive AEC-Q200", Height - Seated (Max)="0.016\" (0.40mm)", Image=//media.digikey.com/Photos/Panasonic%20Photos/ERJ-PA2-Series.jpg, Minimum Quantity=1, Number of Terminations=2, Packaging="Cut Tape (CT)", Part Number=ERJ-2RKF1003X, Part Status=Active, Quantity Available=2645965, Series=ERJ, Size / Dimension="0.039\" L x 0.020\" W (1.00mm x 0.50mm)", Unit Price (USD)=0.00496
R6: library part ERJ-2RKF8062X, "RES SMD 80.6K OHM 1% 1/10W 0402", Digi-Key Part Number=P80.6KLCT-ND, Manufacturer="Panasonic Electronic Components", Operating Temperature="-55°C ~ 155°C", Package / Case="0402 (1005 Metric)", Power (Watts)="0.1W, 1/10W", Supplier Device Package=0402, Temperature Coefficient=±100ppm/°C, Tolerance=±1%, @ qty=1500, Composition="Thick Film", Datasheets=http://industrial.panasonic.com/www-cgi/jvcr13pz.cgi?E+PZ+3+AOA0002+ERJ2RKF8062X+7+WW, Factory Stock=0, Failure Rate=-, Features="Automotive AEC-Q200", Height - Seated (Max)="0.016\" (0.40mm)", Image=//media.digikey.com/Photos/Panasonic%20Photos/ERJ-PA2-Series.jpg, Minimum Quantity=1, Number of Terminations=2, Packaging="Cut Tape (CT)", Part Number=ERJ-2RKF8062X, Part Status=Active, Quantity Available=91747, Series=ERJ, Size / Dimension="0.039\" L x 0.020\" W (1.00mm x 0.50mm)", Unit Price (USD)=0.00496
R8: library part ERJ-2GEJ473X, "RES SMD 47K OHM 5% 1/10W 0402", Digi-Key Part Number=P47KJCT-ND, Manufacturer="Panasonic Electronic Components", Operating Temperature="-55°C ~ 155°C", Package / Case="0402 (1005 Metric)", Power (Watts)="0.1W, 1/10W", Supplier Device Package=0402, Temperature Coefficient=±200ppm/°C, Tolerance=±5%, @ qty=1500, Composition="Thick Film", Datasheets=http://industrial.panasonic.com/www-cgi/jvcr13pz.cgi?E+PZ+3+AOA0001+ERJ2GEJ473X+7+WW, Factory Stock=0, Failure Rate=-, Features="Automotive AEC-Q200", Height - Seated (Max)="0.016\" (0.40mm)", Image=//media.digikey.com/Photos/Panasonic%20Photos/ERJ-PA2-Series.jpg, Minimum Quantity=1, Number of Terminations=2, Packaging="Cut Tape (CT)", Part Number=ERJ-2GEJ473X, Part Status=Active, Quantity Available=5182645, Series=ERJ, Size / Dimension="0.039\" L x 0.020\" W (1.00mm x 0.50mm)", Unit Price (USD)=0.00350
R9: library part ERJ-2GEJ104X, "RES SMD 100K OHM 5% 1/10W 0402", Digi-Key Part Number=P100KJCT-ND, Manufacturer="Panasonic Electronic Components", Operating Temperature="-55°C ~ 155°C", Package / Case="0402 (1005 Metric)", Power (Watts)="0.1W, 1/10W", Supplier Device Package=0402, Temperature Coefficient=±200ppm/°C, Tolerance=±5%, @ qty=1500, Composition="Thick Film", Datasheets=http://industrial.panasonic.com/www-cgi/jvcr13pz.cgi?E+PZ+3+AOA0001+ERJ2GEJ104X+7+WW, Factory Stock=0, Failure Rate=-, Features="Automotive AEC-Q200", Height - Seated (Max)="0.016\" (0.40mm)", Image=//media.digikey.com/Photos/Panasonic%20Photos/ERJ-PA2-Series.jpg, Minimum Quantity=1, Number of Terminations=2, Packaging="Cut Tape (CT)", Part Number=ERJ-2GEJ104X, Part Status=Active, Quantity Available=2387986, Series=ERJ, Size / Dimension="0.039\" L x 0.020\" W (1.00mm x 0.50mm)", Unit Price (USD)=0.00350
R11 R12: library part ERJ-2GEJ332X, "RES SMD 3.3K OHM 5% 1/10W 0402", Digi-Key Part Number=P3.3KJCT-ND, Manufacturer="Panasonic Electronic Components", Operating Temperature="-55°C ~ 155°C", Package / Case="0402 (1005 Metric)", Power (Watts)="0.1W, 1/10W", Supplier Device Package=0402, Temperature Coefficient=±200ppm/°C, Tolerance=±5%, @ qty=1500, Composition="Thick Film", Datasheets=http://industrial.panasonic.com/www-cgi/jvcr13pz.cgi?E+PZ+3+AOA0001+ERJ2GEJ332X+7+WW, Factory Stock=0, Failure Rate=-, Features="Automotive AEC-Q200", Height - Seated (Max)="0.016\" (0.40mm)", Image=//media.digikey.com/Photos/Panasonic%20Photos/ERJ-PA2-Series.jpg, Minimum Quantity=1, Number of Terminations=2, Packaging="Cut Tape (CT)", Part Number=ERJ-2GEJ332X, Part Status=Active, Quantity Available=514266, Series=ERJ, Size / Dimension="0.039\" L x 0.020\" W (1.00mm x 0.50mm)", Unit Price (USD)=0.00350
Y1: "Crystal or Oscillator", Manufacturer_Name=NDK, Mouser Part Number=344-NX3215SA32768K8, Datasheet Link=http://www.ndk.com/images/products/catalog/c_NX3215SA-STD-MUA-14_e.pdf, Manufacturer_Part_Number=NX3215SA-32.768K-STD-MUA-8, Mouser Price/Stock=https://www.mouser.com/Search/Refine.aspx?Keyword=344-NX3215SA32768K8
Y2: "Crystal or Oscillator", Manufacturer_Name="Murata Electronics", Mouser Part Number=81-XRCGB32M000F1H01R, Datasheet Link=https://www.murata.com/en-eu/products/productdetail?partno=XRCGB32M000F1H01R0, Height=0.7mm, Manufacturer_Part_Number=XRCGB32M000F1H01R0, Mouser Price/Stock=https://www.mouser.com/Search/Refine.aspx?Keyword=81-XRCGB32M000F1H01R

## Via types
v1: diameter 0.3, hole 0.15, Top Layer to Bottom Layer, tented both sides, 123 vias
v2: diameter 0.6, hole 0.3, Top Layer to Bottom Layer, tented bottom, 12 vias
v3: diameter 0.6, hole 0.3, Top Layer to Bottom Layer, tented both sides, 7 vias
v4: diameter 0.4, hole 0.2, Top Layer to Bottom Layer, tented both sides, 5 vias

## Nets (pads, with @x,y where several pads share a name; then routed paths per layer and width w, separated by ;. In a path a pad name is that pad's centre, name@x,y a point inside that pad or via, vN(x,y) a via of type N, cw(c..) or ccw(c..) an arc to the next point about the centre after c; other vN are vias at no path point)
3.3V_MCU: C9.1 C11.1 C13.1 C14.1 C15.1 C17.2 C20.1 C23.1 C?.1@-1.905,7.188 FB1.2 IC2.1 IC2.20 IC2.23 IC2.34 IC2.35 IC2.40 IC2.48 IC3.C1 IC5.8 IC6.5 IC?.6 J1.11 J3.2 L4.2 R3.2 R13.2 TP1.1 | length 37.2
  Top Layer w0.152: v1@16.002,4.928 v1(15.977,4.902) 16.017,4.902 16.09,4.976 16.584,4.976 17.272,5.664 IC6.5 ; 17.551,8.022 17.577,8.047 ; TP1.1 22.659,7.923 22.86,7.722 R13.2
  Top Layer w0.203: J3.2@1.27,3.327 1.338,3.327 1.71,2.954 v4(1.778,2.954) ; IC5.8 14.495,7.358 14.572,7.434 14.876,7.434 15.49,8.047 17.577,8.047 19.994,8.047 20.119,7.923 ; v4(24.892,1.143) 24.93,1.105 24.93,0.673 C9.1
  Top Layer w0.254: v1(17.551,7.087) 17.551,8.022 ; 20.119,7.923 TP1.1
  Top Layer w0.305: C9.1 26.756,0.635 26.758,0.637 IC2.1 26.758,0.933 26.756,0.935 26.328,0.935 26.328,1.362 IC2.48
  Layer 1 w0.254: 4.021,4.318 4.064,4.318 ; 25.527,4.699 25.653,4.825 v1(25.653,5.362) ; 32.983,4.535 v1(33.274,4.826)
  Bottom Layer w0.102: J1.11 J1.11@6.147,1.861
  Bottom Layer w0.203: v1@15.951,4.953 15.951,5.579 16.719,6.348 16.897,6.348 17.551,7.002 v1(17.551,7.087) ; C11.1 26.793,7.158 26.912,7.158 v4(27.559,7.805)
  Bottom Layer w0.254: v4(1.778,2.954) 1.818,2.954 1.914,2.858 C17.2 C17.2@2.921,2.858 ; IC3.C1 2.78,4.383 2.78,4.826 ; L4.2 2.78,4.826 ; v4(3.48,4.623) 2.999,4.623 2.788,4.834 2.78,4.826 ; J1.11@6.147,1.861 v3(6.147,2.845) ; v1(25.653,5.362) 26.619,6.328 C11.1 ; 32.085,5.211 32.131,5.258 ; R3.2 32.131,5.258 ; C14.1 32.588,6.159 ; v1(33.274,6.35) 32.779,6.35 32.588,6.159 ; FB1.2@33.962,2.357 34.036,2.431 v4(34.036,3.048) 34.161,3.173 34.161,5.082 33.401,5.842 32.715,5.842 C15.1 ; 32.131,5.258 C15.1 ; C15.1 32.588,6.159
5V: C18.1 IC1.5 IC4.1 IC4.2 J1.3 J2.1 J3.5 R6.2 TP17.1 | length 17.3
  Top Layer w0.152: TP17.1 C18.1
  Top Layer w0.203: v1(38.354,2.921) 38.435,3.002 38.435,2.951 R6.2 38.608,3.861 C18.1
  Top Layer w0.305: J3.5 2.535,5.867 2.484,5.817 2.591,5.817 v3(4.039,5.817)
  Top Layer w0.457: J3.5@2.54,5.867 2.591,5.817 J3.5@2.603,5.804
  Layer 1 w0.254: v3@8.058,2.54 v3(8.146,2.628) 8.146,4.971 v3(8.179,5.004) ; 36.576,3.302 36.584,3.294 36.795,3.294 36.8,3.3 37.114,3.3 37.492,2.921 v1(38.354,2.921)
  Bottom Layer w0.152: J1.3 8.108,2.23 8.103,2.235 8.127,2.26 8.127,2.609 v3(8.146,2.628)
  Bottom Layer w0.254: v3(8.179,5.004) 8.865,5.004 9.273,5.413 10.458,5.413 10.593,5.548 11.801,5.548 11.874,5.474 11.874,4.782 IC1.5 ; v1(38.354,2.921) 38.924,2.921 39.073,2.772 IC4.1@39.073,2.551
  Bottom Layer w0.305: J2.1 19.065,4.92 19.113,4.968 19.166,4.968 v3(20.057,5.859) ; IC4.2 IC4.1
BLINK_PWM: IC2.43 J1.16 TP4.1 | length 31.2
  Top Layer w0.152: v1(4.42,6.782) 4.399,6.761 4.399,6.142 4.394,6.137 4.699,5.832 4.699,1.676 5.814,0.561 19.103,0.561 21.12,2.578 ; TP4.1 22.022,2.057 21.501,2.578 21.12,2.578 ; IC2.43 26.048,3.853 25.246,3.853 24.577,4.521 24.187,4.521 23.863,4.198 23.742,4.198 23.724,4.179 22.639,4.179 22.151,3.692 22.151,3.609 21.12,2.578
  Bottom Layer w0.152: v1(4.42,6.782) 4.568,6.782 4.819,7.033 5.034,7.033 5.108,7.106 J1.16
  Bottom Layer w0.305: J1.16@5.106,7.32 J1.16
BLINK_SIG: IC2.42 J1.9 TP3.1 | length 23.2
  Top Layer w0.102: TP3.1 6.265,1.744
  Top Layer w0.152: 6.265,1.744 6.604,1.744 ; v1(6.604,1.27) 6.604,1.744 ; IC2.42 25.984,4.436 25.589,4.436 25.517,4.509 25.381,4.509 24.86,5.029 23.976,5.029 23.941,4.994 23.929,4.994 23.659,4.724 23.55,4.724 23.514,4.687 22.428,4.687 21.643,3.902 21.643,3.863 18.849,1.069 8.907,1.069 8.706,1.27 8.001,1.27 7.527,1.744 6.604,1.744
BOOT0: IC2.4 J3.4 R5.2 TP14.1 | length 33.9
  Top Layer w0.102: TP14.1@0.66,2.007 0.58,2.007 0.483,2.103 0.462,2.103 0.462,3.925 J3.4
  Top Layer w0.152: J3.4@1.27,4.597 1.88,3.988 2.688,3.988 2.922,3.754 2.922,3.635 3.111,3.446 3.111,3.236 v1(3.808,2.54)
  Bottom Layer w0.152: v1@3.81,2.54 4.318,2.54 5.101,3.323 8.234,3.323 11.303,0.254 27.822,0.254 28.007,0.439 v1(28.297,0.439) 28.297,0.789 R5.2
EXPANSION_INT: IC2.19 J1.6 TP9.1 | length 33.1
  Top Layer w0.102: v1(33.782,4.572) 33.802,4.552 33.802,4.368 TP9.1
  Top Layer w0.152: IC2.19 33.572,4.362 v1(33.782,4.572)
  Bottom Layer w0.102: 11.43,6.373 13.158,6.373 14.478,7.693 23.491,7.693 24.714,6.47 24.714,5.893 25.351,5.256 25.351,5.237 25.528,5.059 25.778,5.059 25.825,5.106 26.771,5.106
  Bottom Layer w0.152: J1.6 7.608,6.591 7.826,6.373 11.43,6.373 ; 26.771,5.106 26.842,5.177 28.514,5.177 28.58,5.11 28.94,5.11 28.949,5.101 30.063,5.101 30.764,4.399 30.764,4.374 31.328,3.81 32.221,3.81 32.584,4.173 32.584,4.768 32.97,5.154 33.492,5.154 33.782,4.864 v1(33.782,4.572)
GND: C1.1 C2.2 C3.2 C4.2 C5.1 C6.1 C7.1 C8.2 C9.2 C10.2 C11.2 C12.2 C13.2 C14.2 C15.2 C16.1 C17.1 C18.2 C19.2 C20.2 C23.2 C?.2 D1.2 IC1.2 IC2.22 IC2.32 IC2.49 IC3.A1 IC3.C2 IC4.6 IC4.9 IC5.3 IC5.4 IC5.9 IC6.3 IC?.3 IC?.7 J1.1 J1.2 J1.10 J1.12 J2.5 J2.6 J2.7 J2.8 J2.9 J2.10 J2.11 J3.6 LPF1.1 LPF1.3 LPF1.5 LPF1.7 P3.1 R5.1 R7.1 R8.2 R11.1 R12.1 | length 46.1
  Top Layer w0.152: v1(10.236,4.851) R8.2 ; v1(10.301,5.791) 10.33,5.819 11.671,5.819 IC5.4 IC5.3 ; IC5.9@12.561,7.403 12.561,6.806 IC5.9 12.776,6.591 IC5.9@12.776,5.817 ; R11.1 16.38,5.966 16.837,5.966 v1(16.866,5.994) ; C20.2 16.561,7.544 17.043,7.061 v1(17.094,7.061) ; IC6.3 17.742,6.744 17.754,6.731 v1(17.78,6.731) ; C23.2@18.415,5.436 C23.2 19.101,5.232 R12.1 19.538,5.004 v1(19.812,5.004) ; v1(22.606,2.794) 22.634,2.822 22.634,2.949 22.987,3.302 C1.1 ; v1(23.241,0.635) C9.2
  Top Layer w0.203: IC2.49@31.369,5.862 IC2.22
  Top Layer w0.254: v1(12.294,7.671) IC5.9@12.561,7.403
  Top Layer w0.305: J3.6@1.347,5.867 1.703,6.223 1.728,6.198 v1(1.829,6.198) ; D1.2 11.049,2.413 v1(11.811,2.413) ; IC2.32 28.758,4.862 IC2.49 ; C18.2 39.625,3.862 39.625,3.252 C19.2 39.62,3.002 39.797,3.002 v1(40.005,2.794)
  Top Layer w0.457: J3.6@1.27,5.867 J3.6@1.347,5.867
  Bottom Layer w0.152: C17.1 3.048,1.486 v1(3.048,1.956) ; J1.12 6.108,7.597 6.182,7.671 v1(6.375,7.671) ; J1.1 9.033,1.397 v1(9.042,1.397) ; J1.2 8.608,7.106 8.78,6.934 v1(9.754,6.934) ; IC1.2@11.714,7.743 11.938,7.519 IC1.2 ; v1(22.606,2.794) v1@22.606,2.921 ; v1(22.987,5.08) 22.987,4.985 23.578,4.394 C3.2 C3.2@24.511,4.394 ; v1(25.019,6.985) C11.2 ; C13.2 33.452,3.353 v1(33.782,3.683)
  Bottom Layer w0.203: IC4.6 IC4.9@37.596,1.528 ; IC4.9@37.596,1.274 IC4.9@37.846,1.524
  Bottom Layer w0.305: 1.473,4.394 1.629,4.239 IC3.A1 ; IC3.C2 3.762,3.839 3.663,3.938 v3(3.653,3.938) ; J2.11 14.154,2.159 v1(15.24,2.159) 15.748,2.159 15.844,2.063 16.272,2.063 J2.10 ; J2.7 14.983,3.952 v1@16.017,3.952 ; v1(16.002,3.937) v1@16.017,3.952 ; J2.5 16.465,4.014 16.417,3.967 16.032,3.967 v1@16.017,3.952 ; J2.9 19.719,1.016 v1(20.447,1.016) 21.017,1.016 21.765,1.764 J2.8 ; v1(19.685,3.556) 19.801,3.672 20.267,3.672 J2.6 ; v2(28.829,3.302) R5.1 C12.2 ; v2(31.369,2.032) 31.407,2.07 32.093,2.07 C10.2
  Bottom Layer w0.457: C16.1 1.473,4.394 1.041,3.962 v1(0.991,3.962) ; C15.2 31.85,6.145 31.85,6.196 v2(31.877,6.223) 31.85,6.25 31.773,6.25 C14.2
  other v1: 35.881,0.463 36.43,0.463 36.98,0.463 37.53,0.463 38.079,0.463 38.629,0.463 39.178,0.463 39.728,0.463 40.278,0.463 40.827,0.463 41.377,0.463 41.927,0.463 42.476,0.463 43.026,0.463 43.576,0.463 44.125,0.463 44.527,0.695 42.202,1.013 44.552,1.127 42.476,1.563 44.552,1.609 42.202,2.112 44.552,2.117 44.552,2.625 41.377,2.662 41.927,2.662 42.476,2.662 43.054,2.727 43.562,2.727 44.07,2.727 40.553,3.212 41.102,3.212 40.827,3.761 41.377,3.761 40.553,4.311 41.102,4.311 38.079,4.861 41.377,4.861 41.403,5.394 37.232,5.412 37.804,5.41 38.354,5.41 39.879,5.706 41.377,5.96 37.53,7.059 41.377,7.059 35.606,7.609 36.155,7.609 38.904,7.609 39.453,7.609 40.003,7.609 40.553,7.609 41.102,7.609 35.174,7.749
  other v2: 27.432,2.032 27.432,3.302 30.353,3.302 29.489,4.267 27.432,4.445 31.242,4.572 30.302,5.537 28.778,5.588 27.432,6.35
I2C1_SCL: IC2.18 J1.8 R3.1 TP6.1 | length 34.5
  Top Layer w0.102: TP6.1 4.039,7.925 v1(4.242,7.925)
  Top Layer w0.152: IC2.18 33.004,3.909 IC2.18@33.27,3.909
  Bottom Layer w0.102: v1(4.242,7.925) 4.445,8.128 7.036,8.128 7.108,8.056 J1.8 ; 23.397,7.464 24.511,6.35 24.511,5.784 25.469,4.826 26.814,4.826
  Bottom Layer w0.152: J1.8@7.109,7.321 7.109,6.633 7.622,6.119 13.815,6.119 15.161,7.464 23.397,7.464 ; 26.814,4.826 26.84,4.852 26.876,4.852 26.947,4.923 27.991,4.923 28.108,4.805 29.896,4.805 29.896,4.775 30.637,4.034 30.656,4.034 31.085,3.605 31.085,3.586 31.318,3.353 R3.1 32.658,3.879 v1(33.27,3.879)
I2C1_SDA: IC2.36 J1.5 R13.1 TP7.1 | length 24.5
  Top Layer w0.102: TP7.1 21.336,4.724 21.641,4.42 21.768,4.42
  Top Layer w0.152: v1(7.595,2.591) 7.595,2.108 7.978,1.725 9.711,1.725 9.719,1.716 19.064,1.716 21.768,4.42 23.294,5.946 23.294,6.683 23.799,7.188 24.333,7.188 25.044,7.899 26.721,7.899 26.758,7.862 IC2.36
  Bottom Layer w0.152: v1(7.595,2.591) 7.601,2.584 7.601,1.829 J1.5
  Bottom Layer w0.203: J1.5 J1.5@7.617,1.831
IMU_INT: IC2.14 J1.7 TP8.1 | length 30.9
  Top Layer w0.102: IC2.14@32.992,1.829 33.909,1.829 TP8.1
  Top Layer w0.152: v1(7.112,1.27) 7.567,0.815 18.954,0.815 21.897,3.758 21.897,3.797 22.533,4.433 23.619,4.433 23.656,4.47 23.764,4.47 24.034,4.74 24.046,4.74 24.081,4.775 24.683,4.775 25.277,4.181 v1(25.381,4.181)
  Bottom Layer w0.102: 30.353,1.524 31.572,1.524 31.704,1.655 32.48,1.655 32.557,1.733
  Bottom Layer w0.152: v1(25.381,4.181) 25.421,4.181 25.538,4.064 25.994,4.064 27.391,2.667 27.686,2.667 28.321,2.032 29.845,2.032 30.353,1.524 ; 32.557,1.733 32.822,1.733 32.822,1.859 v1@32.886,1.796
  other v1: 32.918,1.829
LH_DIODE_ARRAY: C22.2 D1.1 IC5.2 J1.4 R9.1 TP20.1 | length 20.6
  Top Layer w0.102: D1.1 17.96,2.936 18.786,2.936 TP20.1
  Top Layer w0.203: v1(8.077,7.849) 8.077,6.858 ; C22.2 C22.2@9.606,6.549 ; R9.1 10.16,6.858 ; IC5.2 10.16,6.858 ; D1.1 17.719,2.893 17.272,2.893 17.272,3.556 12.446,3.556 11.76,4.242 9.22,4.242 8.682,4.78 8.682,5.212 8.077,5.817 8.077,6.858 ; 8.077,6.858 9.296,6.858 ; 9.296,6.858 C22.2@9.606,6.549 ; 9.296,6.858 9.296,6.826 9.574,6.549 C22.2@9.606,6.549 ; C22.2@9.606,6.549 9.851,6.549 9.883,6.581 9.9,6.581 10.107,6.788 10.107,6.805 10.16,6.858
LH_INV_AMP_N: IC5.6 R4.2 R11.2 TP22.1 | length 3.9
  Top Layer w0.102: R11.2 15.05,5.728 15.062,5.715 15.062,5.309 15.088,5.283 TP22.1
  Top Layer w0.152: IC5.6 13.84,6.327 14.297,6.327 14.897,5.728 15.05,5.728 15.176,5.728 R4.2@16.154,6.706
LH_SIG: IC2.10 IC6.1 R10.1 TP25.1 | length 23
  Top Layer w0.102: R10.1 R10.1@19.787,7.391 ; v1(20.015,7.036) 20.015,7.112 20.218,7.315 TP25.1